# Altium PCB 600V_20A_MotorController_V2.0.PcbDoc (part 2 of 2)
Units mil, origin at the board's own origin, x right, y up, seen from the top; angles counter-clockwise.
Board outline 9360 x 6410 mil, 4 copper layers (Top Layer, GND, VCC, Bottom Layer); 277 components, 153 nets, 1032 pads, 389 vias.
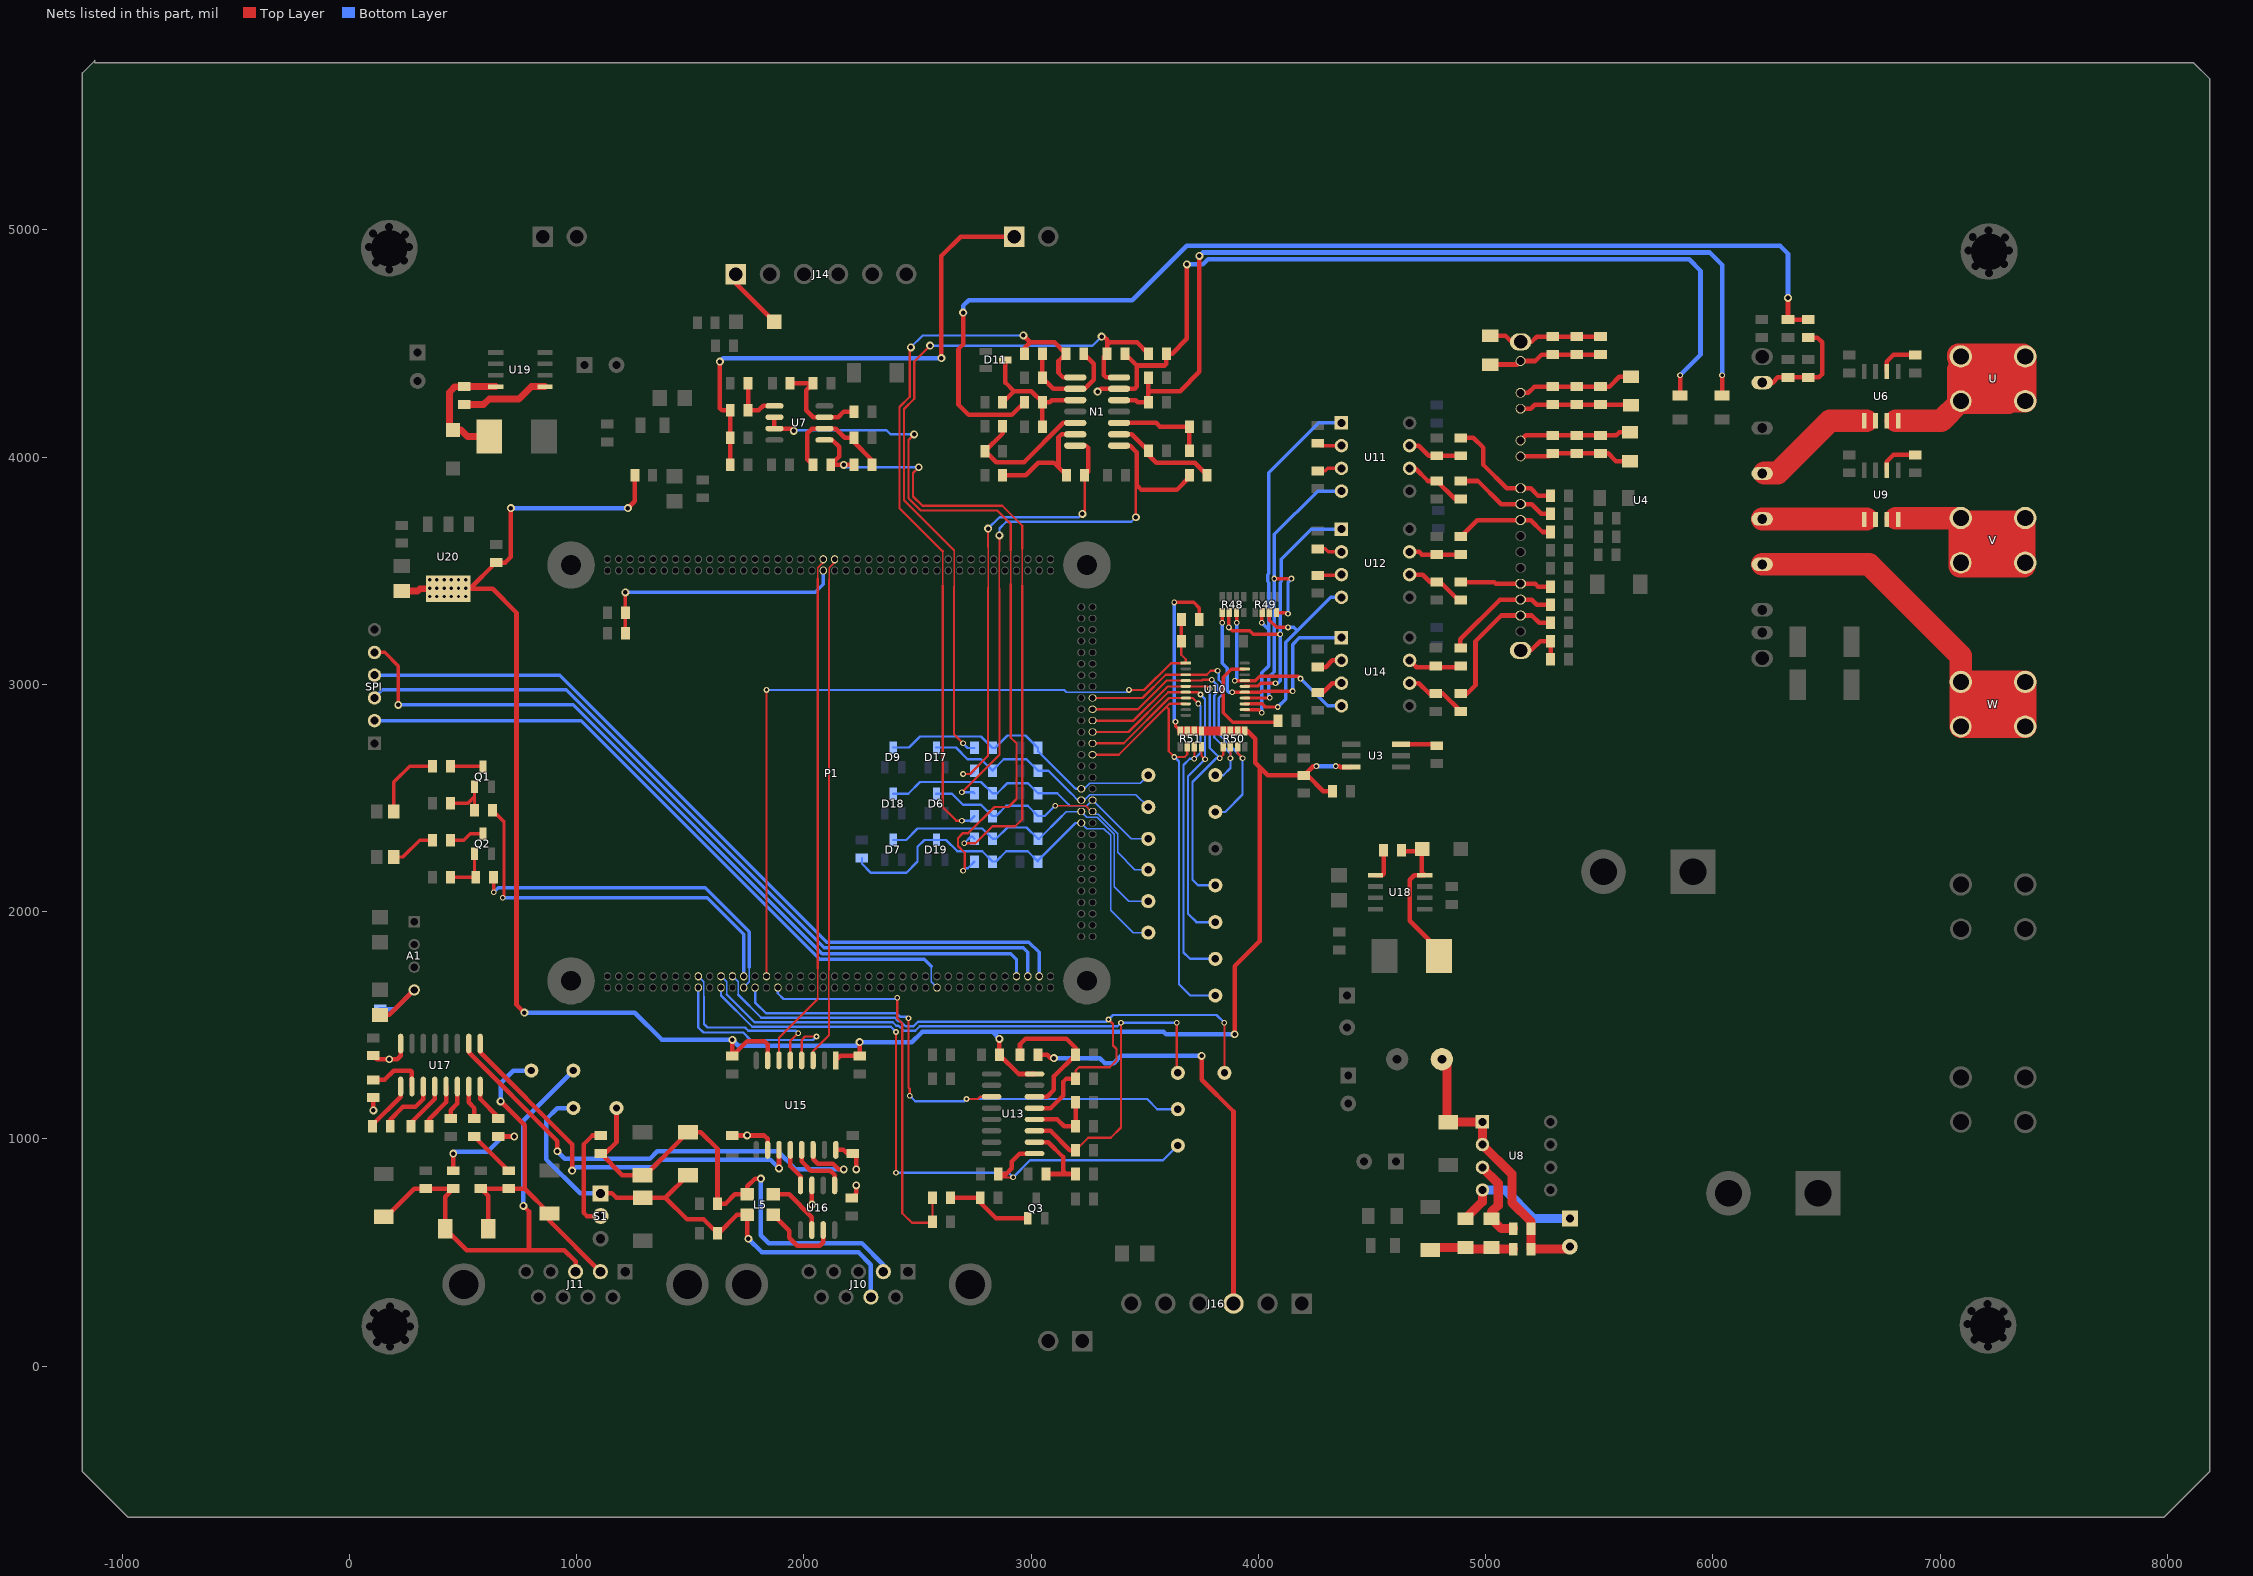
[diagram p4: the nets of this part, all layers, seen from the top]

## Via types
v1: diameter 25, hole 15, Top Layer to Bottom Layer, 193 vias
v2: diameter 35, hole 20, Top Layer to Bottom Layer, 140 vias
v3: diameter 25, hole 16, Top Layer to Bottom Layer, 32 vias
v4: diameter 50, hole 28, Top Layer to Bottom Layer, 23 vias
v5: diameter 28, hole 20, Top Layer to Bottom Layer, 1 vias

## Nets (pads, with @x,y where several pads share a name; then routed paths per layer and width w, separated by ;. In a path a pad name is that pad's centre, name@x,y a point inside that pad or via, vN(x,y) a via of type N, cw(c..) or ccw(c..) an arc to the next point about the centre after c; other vN are vias at no path point) (continued)
"ISO RS232 RX": U15.11 U17.9 | length 1753.2
  Top Layer w20: U17.9@575,1418.98 575,1380 980,975 v2(980,860) ; v2(1890,870) U15.11@1890,951.3
  Bottom Layer w20: v2(980,860) 995,875 1336.05,875 1368.55,907.5 1852.5,907.5 v2(1890,870)
"ISO RS232 TX": U15.14 U17.10 | length 2150.7
  Top Layer w20: U17.10@525,1418.98 525,1380 915,990 v2(915,945) ; U15.14@2040,951.3 2040,910 2060,890 2127.43,890 2152.43,865 v2(2175,865)
  Bottom Layer w20: v2(915,945) 947.76,912.24 1322.24,912.24 1355,945 1885,945 1965,865 v2(2175,865)
"J1-8-TEMP SWITCH2": C67.2 J12.1 R32.2 R36.1 | length 2281.2
  Top Layer w20: v2(1630,4420) 1630,4215 1640,4205 R36.1@1675.63,4205 C67.2@1675.63,4085 R32.2@1675.63,3965 ; v2(2605,4435) 2605,4885 2690,4970 J12.1@2925,4970
  Bottom Layer w20: v2(1630,4420) 1645,4435 v2(2605,4435)
"J1-23-CAN H": C107.2 D27.1 D29.1 J10.7 L5.4 S1.1 TP22.1 | length 2346
  Top Layer w20: S1.1@1105,760 1155,760 1174.72,740.28 D27.1@1290.26,740.28 1390.31,740.28 ; D29.1@1489.74,839.72 1390.31,740.28 ; v2(1755,560) 1750.83,564.17 L5.4@1750.83,665 1705,665 1625,585 C107.2@1619.37,585 1559.37,645 1485.59,645 1390.31,740.28
  Bottom Layer w20: TP22.1@985,1135 915,1135 865,1085 865,910 1015,760 S1.1@1105,760 ; v2(1755,560) 1815,500 2240,500 2294.53,445.47 J10.7@2294.53,303.11
J1-28-TX: C99.2 D30.1 D32.2 J11.2 L4.1 TP21.1 | length 1551.4
  Top Layer w20: D30.1@610.28,604.74 610.28,748.68 C99.2@578.33,780.63 L4.1@700,780.63 770.94,780.63 ; v2(665,1165) 770.94,1059.06 770.94,780.63 ; J11.2@1104.06,414.92 880.26,638.72 D32.2@880.26,671.31 770.94,780.63
  Bottom Layer w20: v2(665,1165) 665,1245 720,1300 TP21.1@800,1300
J1-29-RX: C96.2 D30.2 D31.2 J11.3 L3.1 TP20.1 | length 2118.6
  Top Layer w20: D31.2@150.26,656.31 161.31,656.31 285.63,780.63 C96.2@335,780.63 L3.1@456.67,780.63 421.31,745.27 D30.2@421.31,604.74 516.05,510 790,510 ; v2(765,705) 790,680 790,510 ; J11.3@995,414.92 995,460 945,510 790,510
  Bottom Layer w20: v2(765,705) 765,1080 TP20.1@985,1300
"J1-35-CAN L": C108.2 D28.1 D29.2 J10.2 L5.3 R84.1 TP23.1 | length 2274.1
  Top Layer w20: TP23.1@1175,1135 1175,985 1125.63,935.63 R84.1@1105,935.63 1200.91,839.72 D28.1@1289.74,839.72 1300.76,839.72 D29.2@1489.74,1028.69 1546.31,1028.69 1619.37,955.63 C108.2@1619.37,715 1655,715 1695.55,755.55 L5.3@1750.83,755.55 1750.83,790.83 1785,825 v2(1810,825)
  Bottom Layer w20: v2(1810,825) 1810,575 1845,540 2255,540 2349.06,445.94 J10.2@2349.06,414.92
M+1: C11.1 C16.1 C17.1 D3.2 U4.26 | length 505.6
  Top Layer w20: D3.2@5020,4532.99 5087.01,4532.99 5113.72,4506.28 U4.26@5153.5,4506.28 5201.28,4506.28 5224.37,4529.37 C17.1@5295,4529.37 C11.1@5400,4529.37 C16.1@5505,4529.37
M+2: C22.1 C23.1 C28.1 D4.2 U4.24 | length 515.7
  Top Layer w20: U4.24@5153.5,4282.5 5187.5,4282.5 5214.37,4309.37 C23.1@5295,4309.37 C22.1@5400,4309.37 C28.1@5505,4309.37 5544.37,4309.37 5587.99,4352.99 D4.2@5640,4352.99
M+3: C44.1 C45.1 C47.1 D8.2 U4.22 | length 496.2
  Top Layer w20: U4.22@5153.5,4072.5 5176,4095 C45.1@5295,4095 C47.1@5400,4095 C44.1@5505,4095 5575,4095 5587.99,4107.99 D8.2@5635,4107.99
M-1: C11.2 C16.2 C17.2 D3.1 U4.25 | length 503.1
  Top Layer w20: D3.1@5020,4407.01 5138.01,4407.01 U4.25@5153.5,4422.5 5217.5,4422.5 5245.63,4450.63 C17.2@5295,4450.63 C11.2@5400,4450.63 C16.2@5505,4450.63
M-2: C22.2 C23.2 C28.2 D4.1 U4.23 | length 495.5
  Top Layer w20: U4.23@5153.5,4212.5 5197.5,4212.5 5215.63,4230.63 C23.2@5295,4230.63 C22.2@5400,4230.63 C28.2@5505,4230.63 5636.38,4230.63 D4.1@5640,4227.01
M-3: C44.2 C45.2 C47.2 D8.1 U4.21 | length 501.4
  Top Layer w20: U4.21@5153.5,4002.5 5281.24,4002.5 C45.2@5295,4016.26 C47.2@5400,4016.26 C44.2@5505,4016.26 5538.74,4016.26 5572.99,3982.01 D8.1@5635,3982.01
NetC3_1: C3.1 N1.13 R3.1 R6.2 | length 3847.3
  Top Layer w20: v2(3292.5,4287.5) 3305,4300 N1.13@3386.46,4300 3455,4300 3465,4310 3465,4402.7 ; C3.1@3412.7,4455 3465,4402.7 ; v2(3685,4847.5) 3685,4520 3620,4455 R3.1@3594.37,4455 3594.37,4409.37 3587.7,4402.7 3465,4402.7 ; R6.2@5855,4271.3 v1(5855,4360)
  Bottom Layer w20: v2(3685,4847.5) 3755.53,4847.5 3778.03,4870 5895,4870 5945,4820 5945,4450 v1(5855,4360)
NetC3_2: C3.2 N1.14 R3.2 R14.1 | length 3205.1
  Top Layer w6: 2660,3430 2660.25,3430.25 2660.25,3589.75
  Top Layer w10: v2(2555,4490) 2485,4420 2485,4256.72 2440,4211.72 2440,3810 2660.25,3589.75 ; 2660,3430 2660,2780 v1(2700,2740)
  Top Layer w20: v2(3310,4530) 3320,4530 3333.96,4516.04 3333.96,4493.96 ; N1.14@3386.46,4350 3330,4350 3320,4360 3320,4441.04 C3.2@3333.96,4455 3333.96,4493.96 ; R3.2@3515.63,4455 3465.63,4505 3345,4505 3333.96,4493.96
  Bottom Layer w10: v2(2555,4490) 3270,4490 v2(3310,4530) ; v1(2700,2740) 2720,2720 R14.1@2750.63,2720
NetC4_1: C4.1 N1.2 R5.2 R7.1 | length 502.3
  Top Layer w20: R5.2@3049.37,4455 R7.1@3049.37,4348 3097.37,4300 N1.2@3193.54,4300 3235,4300 3275,4340 3275,4411.04 C4.1@3231.04,4455
NetC4_2: C4.2 N1.1 R5.1 R10.2 | length 3273.2
  Top Layer w6: 2610.25,3434.75 2610.25,3584.75
  Top Layer w10: v2(2470,4482.5) 2465,4477.5 2465,4265 2420,4220 2420,3775 2610.25,3584.75 ; 2610.25,3434.75 2610.25,2459.75 2670,2400 v1(2695,2400)
  Top Layer w20: v2(2965,4535) 2995,4505 ; R5.1@2970.63,4455 2970.63,4480.63 2995,4505 ; N1.1@3193.54,4350 3140,4350 3120,4370 3120,4422.7 C4.2@3152.3,4455 3102.3,4505 2995,4505
  Bottom Layer w10: v2(2470,4482.5) 2522.5,4535 v2(2965,4535) ; v1(2695,2400) 2730.63,2400 R10.2@2750.63,2420
NetC5_1: C5.1 R4.2 R8.1 U7.2 | length 533
  Top Layer w20: R4.2@2038.96,3965 2015,3988.96 2015,4105 2035,4125 U7.2@2090,4125 2140,4125 2180,4085 R8.1@2220.63,4085 2220.63,4064.37 2299.37,3985.63 C5.1@2299.37,3965
NetC5_2: C5.2 R4.1 R11.2 U7.1 | length 2935.3
  Top Layer w6: 2960,3435 2960,3595
  Top Layer w10: v2(2505,3955) 2480,3930 2480,3826.57 2521.57,3785 2872.43,3785 2960,3697.43 2960,3595 ; v1(2705,2300) 2755,2300 2830,2375 2930,2375 2960,2405 2960,3435
  Top Layer w20: U7.1@2090,4075 2125,4075 2155,4045 2155,4002.3 R4.1@2117.7,3965 C5.2@2220.63,3965
  Bottom Layer w10: v2(2175,3965) 2185,3955 v2(2505,3955) ; v1(2705,2300) 2735,2330 2740.63,2330 R11.2@2750.63,2320
NetC21_2: C21.2 R9.2 U4.20 | length 544.9
  Top Layer w20: R9.2@4890,4084.37 4945.63,4084.37 4990,4040 4990,3965 5092.5,3862.5 U4.20@5153.5,3862.5 5197.5,3862.5 5230,3830 C21.2@5285.63,3830
NetC30_2: C30.2 D6.3 P1.183 R10.1 TEMP.1 | length 1193.3
  Top Layer w6: v1(3105,2465) 3240,2465 3265,2440 P1.183@3270,2440
  Bottom Layer w6: P1.183@3270,2440 3283,2427 3294.97,2427 3380,2341.97 3380,2260 3455.71,2184.29 TEMP.1@3515,2184.29
  Bottom Layer w10: D6.3@2582.6,2518.28 2651.72,2518.28 2700,2470 2779.37,2470 R10.1@2829.37,2420 2845,2420 2890,2465 2984.37,2465 C30.2@3029.37,2420 3060,2420 v1(3105,2465)
NetC31_2: C31.2 D7.3 DSP-AD.1 P1.184 R11.1 | length 1551
  Bottom Layer w6: 3135,2420 3155,2440 P1.184@3220,2440 3245,2415 3290,2415 3365,2340 3365,2110 3429.29,2045.71 DSP-AD.1@3515,2045.71
  Bottom Layer w10: D7.3@2392.6,2314.95 2449.95,2314.95 2500,2365 2784.37,2365 R11.1@2829.37,2320 2845,2320 2895,2370 2979.37,2370 C31.2@3029.37,2320 3035,2320 3135,2420
NetC32_2: C32.2 R12.2 R16.1 U7.3 | length 467.4
  Top Layer w20: R16.1@1939.37,4325 C32.2@2040.63,4325 2010,4294.37 2010,4205 2040,4175 U7.3@2090,4175 2150,4175 2175,4200 R12.2@2220.63,4200
NetC38_2: C38.2 D11.3 N1.3 R13.2 R17.1 | length 624.1
  Top Layer w20: R17.1@2874.37,4240 2924.37,4290 ; D11.3@2886.61,4427.6 2886.61,4327.76 2924.37,4290 ; C38.2@3049.37,4134 R13.2@3049.37,4241 ; N1.3@3193.54,4250 3090,4250 3081,4241 R13.2@3049.37,4241 ; 2924.37,4290 3000.37,4290 R13.2@3049.37,4241
NetC39_2: C39.2 D9.3 P1.188 R14.2 VDC.1 | length 1316.5
  Bottom Layer w6: P1.188@3220,2540 3232.75,2540 3257.5,2564.75 3479.75,2564.75 VDC.1@3515,2600
  Bottom Layer w10: D9.3@2392.6,2721.61 2461.61,2721.61 2510,2770 2779.37,2770 R14.2@2829.37,2720 2840,2720 2895,2775 2974.37,2775 C39.2@3029.37,2720 3029.37,2705.63 3195,2540 P1.188@3220,2540
NetC40_2: C40.2 U6.6 | length 180.6
  Top Layer w20: U6.6@6765,4376.54 6765,4420 6794.37,4449.37 C40.2@6890,4449.37
NetC43_2: C43.2 R18.2 U4.19 | length 455.4
  Top Layer w20: R18.2@4890,3894.37 4965.63,3894.37 5067.5,3792.5 U4.19@5153.5,3792.5 5202.5,3792.5 5245,3750 C43.2@5285.63,3750
NetC48_2: C48.2 N1.12 R15.2 R19.2 | length 3912.2
  Top Layer w20: N1.12@3386.46,4250 3460,4250 3469,4241 R19.2@3515.63,4241 3515.63,4290 ; C48.2@3515.63,4348 3515.63,4290 ; v2(3740,4885) 3740,4375 3655,4290 3515.63,4290 ; R15.2@6040,4271.3 v1(6040,4360)
  Bottom Layer w20: v2(3740,4885) 3755,4900 5985,4900 6040,4845 v1(6040,4360)
NetC56_2: C56.2 R20.2 U4.18 | length 447.7
  Top Layer w20: R20.2@4890,3649.37 4963.13,3722.5 U4.18@5153.5,3722.5 5197.5,3722.5 5250,3670 C56.2@5285.63,3670
NetC58_2: C58.2 R25.2 U4.14 | length 403.7
  Top Layer w20: R25.2@4890,3449.37 5038.13,3449.37 5045,3442.5 U4.14@5153.5,3442.5 5217.5,3442.5 5230,3430 C58.2@5285.63,3430
NetC59_2: C59.2 R26.2 U4.13 | length 515.6
  Top Layer w20: R26.2@4887.5,3161.87 4887.5,3197.5 5062.5,3372.5 U4.13@5153.5,3372.5 5202.5,3372.5 5225,3350 C59.2@5285.63,3350
NetC60_2: C60.2 R29.2 U4.12 | length 665.4
  Top Layer w20: R29.2@4890,2959.37 4919.37,2959.37 4955,2995 4955,3190 5067.5,3302.5 U4.12@5153.5,3302.5 5202.5,3302.5 5235,3270 C60.2@5285.63,3270
NetC61_2: C61.2 R31.1 U4.10 | length 229.2
  Top Layer w20: U4.10@5153.5,3148.72 5198.72,3148.72 5240,3190 C61.2@5285.63,3190 R31.1@5285.63,3110
NetC62_1: C62.1 D20.2 U8.4 | length 594.6
  Top Layer w40: D20.2@4910.47,647.52 4985.47,722.52 U8.4@4985.47,774.53
  Bottom Layer w40: U8.4@4985.47,774.53 5085.47,774.53 5211,649 C62.1@5370,649
NetC62_2: C62.2 C70.1 C73.1 D22.2 L2.1 U8.1 U8.2 | length 1260
  Top Layer w40: L2.1@4806.85,1350 4830,1326.85 4830,1081.05 4836.52,1074.53 U8.1@4985.47,1074.53 U8.2@4985.47,974.53 5115,845 5115,719.53 5199.84,634.68 C73.1@5199.84,604.53 C70.1@5199.84,514.53 5359.53,514.53 C62.2@5370,525
NetC64_2: C64.2 U9.6 | length 175.6
  Top Layer w20: U9.6@6765,3941.54 6765,3980 6794.37,4009.37 C64.2@6890,4009.37
NetC65_2: C65.2 D19.3 P1.182 R33.2 R40.2 TEMP1.1 | length 1943.2
  Bottom Layer w6: P1.182@3220,2390 3245,2365 3320,2365 3350,2335 3350,2005 3447.86,1907.14 TEMP1.1@3515,1907.14
  Bottom Layer w10: R40.2@2255,2235.63 2255,2210 2295,2170 2450,2170 2500,2220 2500,2285 2529.95,2314.95 D19.3@2582.6,2314.95 2625.05,2314.95 2675,2265 2784.37,2265 R33.2@2829.37,2220 2845,2220 2890,2265 2984.37,2265 C65.2@3029.37,2220 3029.37,2224.37 3195,2390 P1.182@3220,2390
NetC66_2: C66.2 R36.2 U7.5 | length 243.9
  Top Layer w20: C66.2@1754.37,4325 R36.2@1754.37,4205 1800,4205 1820,4225 U7.5@1870,4225
NetC68_2: C68.2 D17.3 IV.1 P1.186 R37.1 | length 1103
  Bottom Layer w6: 3175,2520 3205,2490 P1.186@3220,2490 3232.75,2490 3257.5,2514.75 3429.75,2514.75 ; 3430,2515 3429.75,2514.75 ; IV.1@3515,2460 3460.25,2514.75 3429.75,2514.75
  Bottom Layer w10: D17.3@2582.6,2721.61 2668.39,2721.61 2720,2670 2779.37,2670 R37.1@2829.37,2620 2879.37,2670 2979.37,2670 C68.2@3029.37,2620 3075,2620 3175,2520
NetC69_2: C69.2 D18.3 IU.1 P1.185 R38.1 | length 1305.2
  Bottom Layer w6: 3165,2470 3169.75,2465.25 3245.25,2465.25 P1.185@3270,2490 3440,2320 IU.1@3515,2320
  Bottom Layer w10: D18.3@2392.6,2518.28 2458.28,2518.28 2510,2570 2779.37,2570 R38.1@2829.37,2520 2850,2520 2895,2565 2984.37,2565 C69.2@3029.37,2520 3115,2520 3165,2470
NetC70_2: C70.2 D20.1 D21.2 Z3.2 | length 372.7
  Top Layer w40: D21.2@4755.73,510.83 4766.43,521.54 D20.1@4910.47,521.54 4917.48,514.53 C70.2@5121.1,514.53
NetC71_2: C71.2 R41.1 R44.2 U4.2 | length 487.6
  Top Layer w20: U4.2@6216.5,4327.5 6262.5,4327.5 6285.63,4350.63 C71.2@6330,4350.63 R44.2@6420,4350.63 6465.63,4350.63 6480,4365 6480,4505 6459.37,4525.63 R41.1@6420,4525.63
NetC73_2: C73.2 U8.3 Z3.1 | length 391.5
  Top Layer w40: U8.3@4995.47,874.53 U8.3@4985.47,874.53 4985.47,872.85 5055,803.33 5055,707.19 5025.47,677.67 Z3.1@5025.47,647.52 5068.46,604.53 C73.2@5121.1,604.53
NetC82_2: C82.2 P1.30 R52.1 U10.1 | length 3362
  Top Layer w10: P1.30@1835,1715 v1(1835,2975) ; v1(3430,2975) 3496.72,2975 3614.72,3093 U10.1@3680,3093 3680,3110 3660.63,3129.37 C82.2@3660.63,3190
  Top Layer w15: C82.2@3660.63,3190 R52.1@3660.63,3285
  Bottom Layer w6: 3150,2970 3154.75,2965.25 3420.25,2965.25 v1(3430,2975)
  Bottom Layer w10: v1(1835,2975) 3145,2975 3150,2970
NetC88_1: C88.1 P1.24 U13.13 Z.1 | length 3241.6
  Top Layer w10: C88.1@3195.63,1265 3195.63,1300.63 3210,1315 3345,1315 3375,1345 3375,1395 3360,1410 3360,1505 v1(3340,1525) ; Z.1@3850,1290 v1(3850,1510)
  Top Layer w20: U13.13@3014.49,1135 3085,1135 3140,1190 3140,1250 3155,1265 C88.1@3195.63,1265
  Bottom Layer w6: P1.24@1685,1715 1710,1690 1710,1635
  Bottom Layer w10: 1710,1635 1812.5,1532.5 2399.07,1532.5 2414.07,1517.5 2424.67,1517.5 2447.17,1495 2481.36,1495 2501.36,1515 3330,1515 v1(3340,1525) 3360,1545 3815,1545 v1(3850,1510)
NetC90_1: C90.1 R67.2 U13.10 | length 364.7
  Top Layer w20: U13.10@3014.49,985 3075,985 3140,920 3140,860 3155,845 ; R67.2@3064.58,845 3155,845 ; C90.1@3195.63,845 3155,845
NetC91_1: C91.1 R72.2 U13.12 | length 298.6
  Top Layer w20: U13.12@3014.49,1085 3115,1085 3145,1055 R72.2@3195.63,1055 C91.1@3195.63,1160
NetC92_1: C92.1 R73.2 U13.14 | length 639.5
  Top Layer w20: R73.2@2950.63,1370 2950.63,1415.63 2975,1440 3155,1440 3195.63,1399.37 C92.1@3195.63,1370 3100,1274.37 3100,1215 3070,1185 U13.14@3014.49,1185
NetC93_1: B.1 C93.1 P1.22 U13.11 | length 3290.3
  Top Layer w10: C93.1@3195.63,950 3250.63,1005 3350,1005 3395,1050 v1(3395,1510) ; v1(3640,1510) 3640,1295 B.1@3645,1290
  Top Layer w20: U13.11@3014.49,1035 3085,1035 3170,950 C93.1@3195.63,950
  Bottom Layer w6: P1.22@1635,1715 1660,1690 1660,1635
  Bottom Layer w10: 1660,1635 1782.5,1512.5 2390.78,1512.5 2405.78,1497.5 2416.39,1497.5 2438.89,1475 2489.64,1475 2509.64,1495 3380,1495 v1(3395,1510) v1(3640,1510)
NetC94_1: A.1 C94.1 P1.21 U13.9 | length 3083.5
  Top Layer w10: v1(2405,850) v1(2405,1470) ; C94.1@2854.79,845 2869.79,830 v1(2920,830)
  Top Layer w20: C94.1@2854.79,845 2890,845 2915,870 2915,900 2950,935 U13.9@3014.49,935
  Bottom Layer w10: P1.21@1635,1665 1635,1630 1772.5,1492.5 2382.5,1492.5 v1(2405,1470) ; v1(2405,850) 2900,850 v1(2920,830) 2995,905 3580,905 A.1@3645,970
NetC95_1: C95.1 Q3.1 R80.1 | length 390
  Top Layer w20: R80.1@2644.37,740 C95.1@2775.63,740 2775.63,719.37 2845,650 Q3.1@2985,650
NetC100_1: C100.1 U17.3 | length 267.5
  Top Layer w20: C100.1@179.37,1055 179.37,1084.37 235,1140 290,1140 325,1175 U17.3@325,1230
NetC100_2: C100.2 U17.1 | length 226.5
  Top Layer w20: C100.2@100.63,1055 100.63,1060.63 225,1185 U17.1@225,1230
NetC101_1: C101.1 U17.2 | length 253.9
  Top Layer w20: C101.1@105,1259.37 154.37,1259.37 195,1300 270,1300 275,1295 U17.2@275,1230
NetC104_1: C104.1 U17.5 | length 206.3
  Top Layer w20: C104.1@349.37,1055 349.37,1084.37 425,1160 U17.5@425,1230
NetC104_2: C104.2 U17.4 | length 218.2
  Top Layer w20: C104.2@270.63,1055 270.63,1070.63 375,1175 U17.4@375,1230
NetC109_1: C109.1 U17.6 | length 153.1
  Top Layer w20: C109.1@445,1089.37 445,1125 475,1155 U17.6@475,1230
NetC110_1: C110.1 D35.2 L8.1 U19.8 | length 558
  Top Layer w30: L8.1@615,4090 520,4090 490.74,4119.25 D35.2@454.82,4119.25 440,4134.08 440,4285 464.37,4309.37 C110.1@505,4309.37 505.63,4310 U19.8@643.46,4310
NetC110_2: C110.2 U19.1 | length 387.9
  Top Layer w30: C110.2@505,4230.63 590.63,4230.63 615,4255 745,4255 800,4310 U19.1@860,4310
NetC111_1: C111.1 D34.2 L7.1 U18.8 | length 677.5
  Top Layer w20: C111.1@4629.37,2265 4710.92,2265 D34.2@4719.26,2273.33 ; D34.2@4720.74,2274.82 D34.2@4719.26,2273.33 ; L7.1@4795,1805 4795,1830 4665,1960 4665,2140 4685,2160 U18.8@4731.54,2160 4719.26,2172.28 D34.2@4719.26,2273.33
NetC111_2: C111.2 U18.1 | length 142.3
  Top Layer w20: U18.1@4515,2160 4545,2160 4550.63,2165.63 C111.2@4550.63,2270
NetD25_2: D25.2 R53.2 | length 329.7
  Top Layer w15: D25.2@194.8,2440 194.8,2569.8 265,2640 R53.2@365.63,2640
NetD26_2: D26.2 R54.2 | length 201.2
  Top Layer w15: D26.2@194.8,2240 235,2240 308.33,2313.33 R54.2@365.63,2313.33
NetD33_2: D33.2 J14.1 | length 279.9
  Top Layer w20: J14.1@1700,4805 1700,4764.43 D33.2@1869.26,4595.18
NetJ15_2: P1.59 SPI.2 | length 3002.7
  Bottom Layer w6: 2560,1760 2560,1690 P1.59@2585,1665
  Bottom Layer w15: SPI.2@110,2840 1018.93,2840 2068.93,1790 2530,1790 2560,1760
NetJ15_3: P1.76 SPI.3 | length 3472.9
  Bottom Layer w15: SPI.3@110,2940 145,2975 954.64,2975 2089.64,1840 2965,1840 2985,1820 P1.76@2985,1715
NetJ15_4: P1.78 SPI.4 | length 3535.3
  Bottom Layer w15: SPI.4@110,3040 925,3040 2100,1865 2990,1865 3035,1820 P1.78@3035,1715
NetJ15_5: P1.74 SPI.5 | length 3559.2
  Top Layer w15: SPI.5@110,3140 155,3140 214.64,3080.36 v2(214.64,2909.64)
  Bottom Layer w15: v2(214.64,2909.64) 984.64,2909.64 2079.29,1815 2910,1815 2935,1790 P1.74@2935,1715
NetL3_2: L3.2 R82.2 | length 444.4
  Top Layer w20: L3.2@456.67,859.37 v2(456.67,935) ; R82.2@655.63,1010 v2(725,1010)
  Bottom Layer w20: v2(456.67,935) 464.17,942.5 607.5,942.5 675,1010 v2(725,1010)
NetL4_2: L4.2 R83.2 | length 213.4
  Top Layer w20: R83.2@550,1010.63 550,1009.37 L4.2@700,859.37
NetL5_1: L5.1 U16.7 | length 352.9
  Top Layer w20: L5.1@1865,665 1935,595 1935,565 1970,530 2070,530 2084.7,544.7 U16.7@2084.7,598.3
NetL5_2: L5.2 U16.6 | length 268.2
  Top Layer w20: L5.2@1865,755.55 1934.45,755.55 2034.7,655.3 U16.6@2034.7,598.3
NetN1_5: N1.5 R42.2 R45.1 | length 632.3
  Top Layer w20: R45.1@2795,4025 R45.1@2795.63,4025 ; R42.2@2874.37,4135 2874.37,4103.74 R45.1@2795.63,4025 ; N1.5@3193.54,4150 3140.9,4150 2968.34,3977.44 2846.4,3977.44 2798.84,4025 R45.1@2795.63,4025
NetN1_6: N1.6 R27.2 R34.1 | length 537.8
  Top Layer w20: R34.1@2874.37,3920 2975.63,3920 3030.63,3975 3100,3975 3120,3955 3120,4086.68 3133.32,4100 N1.6@3193.54,4100 ; 3120,3955.63 R27.2@3155.63,3920
NetN1_7: N1.7 R27.1 R37.2 | length 2003.4
  Top Layer w6: 2810,3425 2810,3605
  Top Layer w10: v1(2700,2605) 2730,2605 2810,2685 2810,3425 ; 2810,3605 v2(2810,3685) ; v2(3225,3750) 3235,3760 3235,3915.51 3234.37,3916.14 R27.1@3234.37,3920
  Top Layer w20: N1.7@3193.54,4050 3240,4050 3250,4040 3250,3935.63 R27.1@3234.37,3920
  Bottom Layer w10: v1(2700,2605) 2735.63,2605 R37.2@2750.63,2620 ; v2(2810,3685) 2860,3735 3210,3735 v2(3225,3750)
NetN1_8: N1.8 R30.1 R38.2 | length 2556.1
  Top Layer w6: 2860,3420 2860,3585
  Top Layer w10: v1(2695,2525) 2860,2690 2860,3420 ; 2860,3585 v2(2860,3655) ; v2(3460,3735) 3460,3870 3465,3875
  Top Layer w20: N1.8@3386.46,4050 3435,4050 3465,4020 3465,3875 3485,3855 3640,3855 3695.63,3910.63 R30.1@3695.63,3920
  Bottom Layer w10: v1(2695,2525) 2745.63,2525 R38.2@2750.63,2520 ; v2(2860,3655) 2860,3685 2890,3715 3440,3715 v2(3460,3735)
NetN1_9: N1.9 R30.2 R35.1 | length 472.8
  Top Layer w20: N1.9@3386.46,4100 3442.63,4100 R35.1@3515.63,4027 3515.63,4009.37 3550,3975 3719.37,3975 R30.2@3774.37,3920
NetN1_10: N1.10 R39.2 R46.1 | length 422.8
  Top Layer w20: N1.10@3386.46,4150 3550,4150 3566,4134 R39.2@3695.63,4134 R46.1@3695.63,4027
NetP1_17: P1.17 U15.4 | length 885.2
  Top Layer w10: U15.4@1990,1345 1990,1435 2005,1450 v1(2055,1450)
  Bottom Layer w10: P1.17@1535,1665 1535,1490 1557.5,1467.5 1732.5,1467.5 1765,1435 2040,1435 v1(2055,1450)
NetP1_18: P1.18 U15.5 | length 786.4
  Top Layer w10: U15.5@1940,1345 1940,1430 v1(1975,1465)
  Bottom Layer w6: P1.18@1535,1715 1560,1690 1560,1625
  Bottom Layer w10: 1560,1625 1560,1505 1575,1490 1740,1490 1755,1475 1965,1475 v1(1975,1465)
NetP1_25: P1.25 R60.2 | length 1534.7
  Top Layer w15: R60.2@634.37,2150 635,2149.37 v1(635,2085)
  Bottom Layer w6: P1.25@1735,1665 1760,1690 1760,1755
  Bottom Layer w15: v1(635,2085) 655,2105 1565,2105 1760,1910 1760,1755
NetP1_26: P1.26 R59.2 | length 1719.1
  Top Layer w15: R59.2@629.37,2445 680,2394.37 680,2065 v1(675,2060)
  Bottom Layer w15: v1(675,2060) 1574.64,2060 1735,1899.64 P1.26@1735,1715
NetP1_27: GPIO.1 P1.27 U13.3 | length 2438.9
  Top Layer w10: v1(2460,1530) 2460,1225 2465,1220 v1(2465,1190) ; v1(2715,1175) 2765,1175 2775,1185 U13.3@2825.51,1185
  Bottom Layer w10: P1.27@1785,1665 1785,1600 1832.5,1552.5 2407.35,1552.5 2422.35,1537.5 2452.5,1537.5 v1(2460,1530) ; v1(2465,1190) 2490,1165 2705,1165 v1(2715,1175) 3510,1175 3555,1130 GPIO.1@3645,1130
NetP1_31: P1.31 R80.2 R81.1 | length 1791.2
  Top Layer w10: v1@2415,1615 v1(2410,1620) 2410,1530 2432.5,1507.5 2432.5,672.5 2475,630 2560.63,630 R81.1@2565.63,635 R80.2@2565.63,740
  Bottom Layer w10: P1.31@1885,1665 1885,1640 1910,1615 2405,1615 v1(2410,1620) v1@2415,1615
NetP1_119: P1.119 R74.1 R75.2 | length 1124.8
  Top Layer w15: R75.2@1214.37,3225 R74.1@1214.37,3315 v2(1214.37,3404.37)
  Bottom Layer w15: v2(1214.37,3404.37) 2049.37,3404.37 2085,3440 P1.119@2085,3500
NetP1_120: P1.120 U15.6 | length 2285.8
  Top Layer w6: 2060.25,1614.75 2060.25,1750 ; 2060.25,3465 2060.25,3512.5 2085,3537.25 P1.120@2085,3550
  Top Layer w10: U15.6@1890,1345 1890,1444.5 2060.25,1614.75 ; 2060.25,1750 2060.25,3465
NetP1_122: P1.122 U15.3 | length 2244.4
  Top Layer w6: 2110,1605 2110,1745 ; 2110.25,3460 2110.25,3512.5 2135,3537.25 P1.122@2135,3550
  Top Layer w10: U15.3@2040,1345 2040,1385 2110,1455 2110,1605 ; 2110,1745 2110.25,1745.25 2110.25,3460
NetP1_193: P1.193 PWM1.1 R51.2 U10.8 | length 2021
  Top Layer w10: P1.193@3270,2690 3385,2690 3608.87,2913.87 U10.8@3680,2913.87 ; 3595,2900 3605,2890 3605,2705 v1(3630,2680) 3675,2680 3686.5,2691.5 R51.2@3686.5,2725
  Bottom Layer w10: v1(3630,2680) 3650,2660 3650,1680 3700,1630 PWM1.1@3810,1630
NetP1_195: P1.195 PWM2.1 R51.3 U10.7 | length 1905
  Top Layer w10: P1.195@3270,2740 3406.57,2740 3606.02,2939.46 U10.7@3680,2939.46 3710.54,2939.46 v1(3735,2915) ; v1(3717.99,2672.01) R51.3@3717.99,2725
  Bottom Layer w10: v1(3735,2915) 3745,2905 3745,2699.02 v1(3717.99,2672.01) 3697.01,2672.01 3670,2645 3670,1820 3698.33,1791.67 PWM2.1@3810,1791.67
NetP1_197: P1.197 PWM3.1 R51.4 U10.6 | length 1752.6
  Top Layer w10: P1.197@3270,2790 3428.28,2790 3603.33,2965.05 U10.6@3680,2965.05 3734.95,2965.05 v1(3745,2955) ; R51.4@3749.49,2725 3749.49,2685.51 v1(3765,2670)
  Bottom Layer w10: v1(3745,2955) 3765,2935 v1(3765,2670) 3690,2595 3690,1990 3726.67,1953.33 PWM3.1@3810,1953.33
NetP1_199: P1.199 PWM4.1 R50.1 U10.5 | length 1665.5
  Top Layer w10: P1.199@3270,2840 3450,2840 3600.64,2990.64 U10.5@3680,2990.64 3774.36,2990.64 v1(3785,2980) ; v1(3830,2675) 3845,2690 R50.1@3845,2725
  Bottom Layer w10: v1(3785,2980) 3785,2720 v1(3830,2675) 3815,2675 3710,2570 3710,2270 3710,2140 3735,2115 PWM4.1@3810,2115
NetP1_201: P1.201 PWM5.1 R50.2 U10.4 | length 1143.1
  Top Layer w10: P1.201@3270,2890 3470,2890 3596.23,3016.23 3751.23,3016.23 3755,3020 v1(3795,3020) ; v1(3876.5,2675) R50.2@3876.5,2725
  Bottom Layer w10: v1(3795,3020) 3820,2995 3820,2965 3805,2950 3805,2766.72 3876.5,2695.22 v1(3876.5,2675) 3876.5,2631.5 3845,2600 PWM5.1@3810,2600
NetP1_203: P1.203 PWM6.1 R50.3 U10.3 | length 1413.6
  Top Layer w10: P1.203@3270,2940 3490,2940 3591.82,3041.82 U10.3@3680,3041.82 3771.82,3041.82 3790,3060 v1(3820,3060) ; R50.3@3907.99,2725 3907.99,2697.01 v1(3930,2675)
  Bottom Layer w10: PWM6.1@3810,2438.33 3853.33,2438.33 3930,2515 v1(3930,2675) 3825,2780 3825,2940 3840,2955 3840,2970 3840,3005 3825,3020 3825,3055 v1(3820,3060)
NetQ1_1: Q1.1 R59.1 R61.1 | length 221.7
  Top Layer w15: R61.1@444.37,2476.67 521.67,2476.67 550,2505 ; R59.1@550,2445.63 550,2505 ; Q1.1@550,2550 550,2505
NetQ1_3: Q1.3 R53.1 | length 144.4
  Top Layer w15: R53.1@444.37,2640 584.02,2640 Q1.3@587.4,2636.61
NetQ2_1: Q2.1 R60.1 R62.1 | length 218.6
  Top Layer w15: R62.1@444.37,2150 R60.1@555.63,2150 550,2155.63 Q2.1@550,2255
NetQ2_3: Q2.3 R54.1 | length 154.7
  Top Layer w15: R54.1@444.37,2313.33 503.33,2313.33 531.61,2341.61 Q2.3@587.4,2341.61
NetR2_2: R2.2 U3.3 | length 160
  Top Layer w20: U3.3@4627.78,2735.98 4778.39,2735.98 R2.2@4785,2729.37
NetR33_1: R33.1 U7.6 U7.7 | length 3231.8
  Top Layer w6: 2910,3440 2910,3590
  Top Layer w10: v2(2485,4100) 2460,4075 2460,3818.28 2513.28,3765 2850,3765 2910,3705 2910,3590 ; v1(2700,2180) 2707.5,2187.5 2707.5,2258.61 2677.5,2288.61 2677.5,2322.5 2700,2345 2723.28,2345 2838.28,2460 2900,2460 2935,2495 2935,2740 2910,2765 2910,3440
  Top Layer w20: U7.6@1870,4175 U7.7@1870,4125 v2@1950,4125
  Bottom Layer w10: v2(1955,4115) 1957.5,4117.5 2363.46,4117.5 2380.96,4100 v2(2485,4100) ; v1(2700,2180) 2710,2190 2720.63,2190 R33.1@2750.63,2220
NetR55_1: R55.1 U11.3 | length 104.4
  Top Layer w15: R55.1@4260,3939.37 4294.37,3939.37 4305,3950 U11.3@4360,3950
NetR56_1: R56.1 U11.2 | length 104.4
  Top Layer w15: R56.1@4260,4060.63 4270.63,4050 U11.2@4360,4050
NetR63_1: R63.1 U12.3 | length 106.3
  Top Layer w15: R63.1@4260,3479.37 4361.87,3479.37 U12.3@4365,3482.5
NetR64_1: R64.1 U12.2 | length 110.4
  Top Layer w15: R64.1@4260,3595.63 4294.37,3595.63 4307.5,3582.5 U12.2@4365,3582.5
NetR68_1: R68.1 U14.3 | length 121.8
  Top Layer w20: R68.1@4260,2964.37 4284.37,2964.37 4325,3005 U14.3@4365,3005
NetR69_1: R69.1 U14.2 | length 117.2
  Top Layer w20: R69.1@4260,3075.63 4295.63,3075.63 4325,3105 U14.2@4365,3105
NetR84_2: R84.2 S1.2 | length 472.5
  Top Layer w20: S1.2@1105,660 1045,660 1030,675 1030,975 1069.37,1014.37 R84.2@1105,1014.37
NetR90_2: R90.2 U10.19 | length 522.4
  Top Layer w15: U10.19@3938.25,3065.82 3880.81,3065.82 3845,3030 3845,2875 3887.5,2832.5 4083.13,2832.5 R90.2@4085.63,2830
NetU15_12: U15.12 U16.4 | length 174.7
  Top Layer w20: U15.12@1940,951.3 1940,880 1984.7,835.3 U16.4@1984.7,795.15
NetU15_13: U15.13 U16.1 | length 265.9
  Top Layer w20: U15.13@1990,951.3 1990,900 2030,860 2115,860 2134.7,840.3 U16.1@2134.7,795.15
OPWM1: R49.2 U10.12 U11.1 | length 1651.4
  Top Layer w15: U10.12@3939.84,2888.27 4001.72,2888.27 v1(4015,2875) ; v1(4015,3270) 4015,3313.5 R49.2@4016.5,3315
  Bottom Layer w15: v1(4015,2875) 4015,3050.36 4045,3080.36 4045,3240 ; v1(4015,3270) 4045,3240 ; U11.1@4365,4150 4265,4150 4045,3930 4045,3487.43 4040,3482.43 4040,3452.57 4045,3447.57 4045,3240
OPWM2: R49.3 U10.13 U12.4 | length 951.6
  Top Layer w15: U10.13@3939.84,2913.87 4016.13,2913.87 4030,2900 v1(4085,2900) ; R49.3@4047.99,3315 4047.99,3282.01 4080,3250 v1(4130,3250)
  Bottom Layer w15: v1(4085,2900) 4120,2935 4120,3185.36 4169.82,3235.18 ; v1(4130,3250) 4155,3250 4169.82,3235.18 ; U12.4@4365,3382.5 4317.14,3382.5 4169.82,3235.18
OPWM3: R49.4 U10.14 U11.4 | length 1505.3
  Top Layer w15: U10.14@3939.84,2939.46 4049.46,2939.46 v1(4050,2940) ; v1(4070,3465) v1(4145,3465) ; R49.4@4079.49,3315 4125,3315 v1(4130,3310)
  Bottom Layer w15: v1(4050,2940) 4045,2945 4045,3029.64 4070,3054.64 v1(4070,3465) 4070,3660 4260,3850 U11.4@4365,3850 ; v1(4130,3310) 4130,3450 v1(4145,3465)
OPWM4: R48.1 U10.15 U14.1 | length 1076.9
  Top Layer w15: v1(3840,3270) R48.1@3840,3315 ; v1(3885,2965) v1(3885,2965) U10.15@3939.84,2965.05 4009.41,2965.05 4014.36,2970 v1(4150,2970)
  Bottom Layer w15: v1(3840,3270) 3840,3092.43 3862.5,3069.93 3862.5,2972.5 3870,2965 v1(3885,2965) ; v1(4150,2970) 4150,3175 4180,3205 U14.1@4365,3205
OPWM5: R48.2 U10.16 U12.1 | length 1325.2
  Top Layer w15: R48.2@3871.5,3315 3870,3313.5 v1(3870,3250) 3884.94,3235.06 3961.3,3235.06 3976.36,3220 v1(4095,3220) ; U10.16@3939.84,2990.64 3941.44,2992.23 3997.23,2992.23 4010,3005 v1(4075,3005)
  Bottom Layer w15: v1(4075,3005) 4085,3005 4095,3015 v1(4095,3220) 4095,3447.57 4100,3452.57 4100,3550 4232.5,3682.5 U12.1@4365,3682.5
OPWM6: R48.3 U10.17 U14.4 | length 837.1
  Top Layer w15: v1(3895,3015) 3896.23,3016.23 U10.17@3939.84,3016.23 3986.23,3016.23 4005,3035 4175,3035 v1(4185,3025) ; R48.3@3902.99,3315 3905,3312.99 v1(3905,3270)
  Bottom Layer w15: v1(3895,3015) 3905,3025 v1(3905,3270) ; v1(4185,3025) 4305,2905 U14.4@4365,2905
RS232R2: R82.1 U17.8 | length 173.8
  Top Layer w20: U17.8@575,1230 575,1175 655,1095 R82.1@655,1089.37
RS232T2: R83.1 U17.7 | length 151
  Top Layer w20: U17.7@525,1230 525,1160 550,1135 R83.1@550,1089.37
TEMP1: C72.2 R13.1 R41.2 | length 4920.6
  Top Layer w20: v2(2700,4635) 2700,4495 2680,4475 2680,4230 2725,4185 2914.63,4185 R13.1@2970.63,4241 ; v2(6330,4700) C72.2@6330,4604.37 R41.2@6420,4604.37
  Bottom Layer w20: v2@2710,4635 v2(2700,4635) 2700,4665 2725,4690 3445,4690 3685,4930 6295,4930 6330,4895 v2(6330,4700)
U: U6.3 U6.4 U.1 | length 2416.9
  Top Layer w100: U6.4@6805,4160 7004.51,4160 U.1@7084.51,4240 ; 7301.07,4241.07 7300,4240 U.1@7084.51,4240 ; 7336.44,4312.5 7080.47,4312.5 ; 7363.94,4340 7363.94,4385 ; U.1@7373.94,4442.82 U.1@7373.94,4245.96 U.1@7090.47,4245.96 U.1@7084.51,4240 ; 7080.47,4312.5 7080.47,4385 7363.94,4385 ; 7080.47,4312.5 7080.47,4240 U.1@7084.51,4240 ; 7363.94,4385 7363.94,4388.65 ; 7363.94,4388.65 7315.73,4436.85 7080.47,4436.85 7080.47,4450 7363.94,4450 7363.94,4388.65
U1: U4.4 U6.1 U6.2 | length 545.3
  Top Layer w100: U4.4@6225,3930 6285,3930 6515,4160 U6.1@6675,4160
UN: R25.1 R66.1 U12.6 | length 271.3
  Top Layer w20: U12.6@4665,3482.5 4722.5,3482.5 4755.63,3449.37 R66.1@4785,3449.37 4800.63,3449.37 4879.37,3370.63 R25.1@4890,3370.63
UP: R9.1 R57.1 U11.7 | length 243.4
  Top Layer w20: U11.7@4665,4050 4705,4050 4749.37,4005.63 R57.1@4785,4005.63 R9.1@4890,4005.63
V: U9.3 U9.4 V.1 | length 1816.4
  Top Layer w100: U9.4@6805,3730 V.1@7090.47,3730 ; V.1@7080,3715 V.1@7085.47,3715 ; V.1@7085.47,3716.98 V.1@7085.47,3715 ; 7090.47,3640 7085.47,3645 ; V.1@7363.94,3580 V.1@7085.47,3580 ; 7363.94,3645 7085.47,3645 ; V.1@7085.47,3580 7085.47,3645 ; V.1@7085.47,3580 7085.47,3520.13 7368.94,3520.13 7368.94,3716.98 7366.96,3715 V.1@7085.47,3715 ; 7085.47,3645 V.1@7085.47,3715
V1: U4.5 U9.1 U9.2 | length 458.5
  Top Layer w100: U4.5@6216.5,3727.5 U9.1@6675,3727.5
VCC_CAN: A1.6 C98.1 C101.2 C102.1 C103.2 C106.2 C113.2 C127.1 U15.10 U15.16 U16.3 U17.16 | length 1108.6
  Top Layer w20: v2(105,1125) C101.2@105,1175 ; C102.1@105,1365.63 120.63,1350 v2(175,1350) 210,1350 225,1365 U17.16@225,1418.98 ; C127.1@135,1545 175,1545 A1.6@285,1655 ; C106.2@1685,1014.37 1825.63,1014.37 1840,1000 U15.10@1840,951.3 ; v2@2034.7,710 U16.3@2034.7,795.15 ; U15.16@2140,951.3 2173.7,951.3 C98.1@2189.37,935.63 ; C103.2@2210,739.37 2230,759.37 v2(2230,795) ; C98.1@2215,935.63 2230,920.63 v2(2230,865)
  Bottom Layer w20: C113.2@135,1570.63 200.63,1570.63 A1.6@285,1655
  other v2: 2035,710 1750,1015
VDD: C1.2 C83.1 C97.2 C105.1 C125.1 C129.2 L10.1 R1.2 R50.5 R50.6 R50.7 R50.8 R51.5 R51.6 R51.7 R51.8 R52.2 U3.6 U13.16 U15.1 U15.7 U20.2@435,3420 | length 10502.7
  Top Layer w10: R51.8@3655,2795 R51.8@3662.5,2795 ; R50.5@3930,2795 R50.6@3907.99,2795 R50.5@3939.49,2795
  Top Layer w15: v1(3630,3360) 3715,3360 3739.37,3335.63 R52.2@3739.37,3285 ; v1(3635,2835) 3635,2815 R51.8@3655,2795
  Top Layer w20: U20.2@485,3420 U20.2@529.37,3420 ; v2(710,3775) 710,3560 685.63,3535.63 C129.2@645,3535.63 U20.2@529.37,3420 ; v2(770,1555) 735,1590 735,3315 630,3420 U20.2@529.37,3420 ; v2(1225,3775) 1255.63,3805.63 L10.1@1255.63,3920 ; v2(1685,1435) C105.1@1685,1364.37 1750.63,1430 1825,1430 1840,1415 U15.7@1840,1345 ; U15.1@2140,1345 2159.37,1364.37 C97.2@2245,1364.37 v2(2245,1425) ; v2@2859.37,1440 C83.1@2859.37,1370 2944.37,1285 U13.16@3014.49,1285 ; v2@3895,1459 3895,1760 4005,1870 4005,2635 ; R50.5@3939.49,2795 3950,2795 3985,2760 3985,2655 4040.63,2599.37 C1.2@4200,2599.37 ; v1(4255,2640) 4240.63,2640 C1.2@4200,2599.37 ; R1.2@4325,2530 4285,2530 4215.63,2599.37 C1.2@4200,2599.37 ; v1(4340,2640) 4355,2640 4360,2635 4406.8,2635 U3.6@4407.78,2635.98
  Top Layer w30: C125.1@230,3410 300,3410 310,3420 U20.2@435,3420
  Top Layer w40: R51.8@3662.5,2795 R51.6@3717.99,2795 R51.5@3749.49,2795 R50.8@3845,2795 R50.5@3930,2795
  Bottom Layer w15: v1(3630,3360) 3630,2840 v1(3635,2835)
  Bottom Layer w20: v2(710,3775) v2(1225,3775) ; v2(770,1555) 1255,1555 1375,1435 v2(1685,1435) 1710,1410 2230,1410 v2(2245,1425) 2475,1425 2520,1470 2830,1470 ; v2(2860,1440) 2830,1470 ; v2@3895,1459 3593.88,1459 3582.88,1470 2830,1470 ; v1(4255,2640) v1(4340,2640)
  other v1: 353,3386 384.67,3386 416.33,3386 448,3386 479.67,3386 511.33,3386 353,3423 384.67,3423 416.33,3423 448,3423 479.67,3423 511.33,3423 353,3459 384.67,3459 416.33,3459 448,3459 479.67,3459 511.33,3459
  other v2: 3895,1460
VN: R26.1 R70.1 U14.7 | length 234.8
  Top Layer w20: U14.7@4665,3105 4695,3075 4879.37,3075 R26.1@4885,3080.63
VP: R18.1 R58.1 U11.6 | length 285.7
  Top Layer w20: U11.6@4660,3950 4690,3950 4745.63,3894.37 R58.1@4785,3894.37 4863.74,3815.63 R18.1@4890,3815.63
W: U4.6 W.1 | length 2622.3
  Top Layer w100: U4.6@6216.5,3527.5 6687.5,3527.5 7090.47,3124.53 W.1@7090.47,3010.32 W.1@7373.94,3010.32 W.1@7373.94,2813.46 W.1@7090.47,2813.46 7090.47,2900 ; W.1@7344.02,2984.92 7090.47,2984.92 7090.47,2900 ; 7368.94,2900 7090.47,2900
WN: R29.1 R71.1 U14.6 | length 276.5
  Top Layer w20: U14.6@4665,3005 4705,3005 4750.63,2959.37 R71.1@4780,2959.37 4811.26,2959.37 R29.1@4890,2880.63
WP: R20.1 R65.1 U12.7 | length 229.9
  Top Layer w20: U12.7@4665,3582.5 4707.5,3582.5 4719.37,3570.63 R65.1@4785,3570.63 R20.1@4890,3570.63
Z: J16.3 R73.1 | length 1897.6
  Top Layer w20: R73.1@3029.37,1370 3070,1370 3085,1355 v2(3100,1355) ; v2(3750,1365) 3750,1260 3890,1120 J16.3@3890,275
  Bottom Layer w20: v2(3100,1355) 3301.97,1355 3324.47,1332.5 3362.5,1332.5 3395,1365 v2(3750,1365)
pads on no net: D11.2 J10.1 J10.4 J10.5 J10.6 J10.8 J10.9 J11.1 J11.4 J11.6 J11.7 J11.8 J11.9 J14.4 J14.5 J14.6 P1.11 P1.12 P1.13 P1.14 P1.15 P1.16 P1.19 P1.20 P1.23 P1.28 P1.32 P1.33 P1.34 P1.35 P1.36 P1.37 P1.38 P1.39 P1.40 P1.41 P1.42 P1.43 P1.44 P1.45 P1.46 P1.47 P1.48 P1.49 P1.50 P1.51 P1.52 P1.53 P1.54 P1.55 P1.56 P1.57 P1.58 P1.60 P1.61 P1.62 P1.63 P1.64 P1.65 P1.66 P1.67 P1.68 P1.69 P1.70 P1.71 P1.72 P1.73 P1.75 P1.77 P1.79 P1.80 P1.83 P1.84 P1.85 P1.86 P1.87 P1.88 P1.89 P1.90 P1.91 P1.92 P1.93 P1.94 P1.95 P1.96 P1.97 P1.98 P1.99 P1.100 P1.101 P1.102 P1.103 P1.104 P1.105 P1.106 P1.107 P1.108 P1.109 P1.110 P1.111 P1.112 P1.113 P1.114 P1.115 P1.116 P1.117 P1.118 P1.121 P1.123 P1.124 P1.125 P1.126 P1.127 P1.128 P1.129 P1.130 P1.131 P1.132 P1.133 P1.134 P1.135 P1.136 P1.137 P1.138 P1.139 P1.140 P1.141 P1.142 P1.143 P1.144 P1.145 P1.146 P1.147 P1.148 P1.149 P1.150 P1.151 P1.152 P1.153 P1.154 P1.155 P1.156 P1.165 P1.166 P1.167 P1.168 P1.169 P1.170 P1.171 P1.172 P1.173 P1.174 P1.175 P1.176 P1.177 P1.178 P1.179 P1.180 P1.181 P1.187 P1.194 P1.196 P1.198 P1.200 P1.202 P1.204 P1.205 P1.206 P1.207 P1.208 P1.209 P1.210 P1.211 P1.212 P1.213 P1.214 P1.215 P1.216 P1.261 P1.262 P1.263 P1.264 R48.4 R49.1 R50.4 R51.1 S1.3 U3.2 U10.2 U10.9 U10.11 U10.18 U13.4 U13.5 U13.6 U13.7 U16.5 U17.11 U17.12 U17.13 U17.14 U18.5 U19.5 U20.2@435,3703.94
copper on no net:
  other v3: 976.38,1626.65 3246.38,1631.65 930.42,1645.69 1022.34,1645.69 3200.42,1650.69 3292.34,1650.69 911.38,1691.65 1041.38,1691.65 3181.38,1696.65 3311.38,1696.65 930.42,1737.62 1022.34,1737.62 3200.42,1742.62 3292.34,1742.62 976.38,1756.65 3246.38,1761.65 976.38,3461.65 3246.38,3461.65 930.42,3480.69 1022.34,3480.69 3200.42,3480.69 3292.34,3480.69 911.38,3526.65 1041.38,3526.65 3181.38,3526.65 3311.38,3526.65 930.42,3572.62 1022.34,3572.62 3200.42,3572.62 3292.34,3572.62 976.38,3591.65 3246.38,3591.65
  other v4: 2775,4645

## Polygon pours and split planes (outlines as drawn)
GND_CAN on Bottom Layer "Top Layer-No Net" (solid, remove dead copper, pour order 38): 21.42,1590.62 21.42,1670.62 36.42,1685.62 564.67,1685.62 606.42,1643.87 606.42,1480.62 741.42,1345.62 1046.42,1345.62 1336.42,1055.62 2231.42,1055.62 2246.42,1040.62 2246.42,540.62 2386.42,400.62 2741.42,400.62 2771.42,370.62 2771.42,5.62 2761.42,-4.38 416.42,-4.38 376.42,35.62 376.42,300.62 313.39,363.64 68.39,363.64 26.42,405.62 21.42,410.62 21.42,1585.62
AGND on Bottom Layer "Top Layer-No Net" (solid, remove dead copper, pour order 42): 770,2445 770,3360 790,3380 1075,3380 1130,3435 3135,3435 3165,3405 3165,1810 3115,1760 1140,1760 1055,1845 775,1845 755,1865 755,2425 765,2435
VDD on Bottom Layer "Top Layer-No Net" (solid, remove dead copper, pour order 45): 200,3440 200,3475 205,3480 700,3480 705,3475 705,3195 675,3165 220,3165 200,3185 200,3440
VCC_CAN on VCC "Top Layer-No Net" (solid, remove dead copper, pour order 37): 25,1590 25,1670 40,1685 568.25,1685 610,1643.25 610,1480 745,1345 1050,1345 1340,1055 2235,1055 2250,1040 2250,540 2390,400 2745,400 2775,370 2775,5 2765,-5 420,-5 380,35 380,300 316.98,363.02 71.98,363.02 30,405 25,410 25,1585
AVDD on VCC "Top Layer-No Net" (solid, remove dead copper, pour order 31): 2255,2815 2630,2815 2635,2810 2635,1990 2615,1970 2235,1970 2200,2005 2200,2800 2210,2810 2250,2810
A+5V on VCC "Top Layer-No Net 1" (solid, remove dead copper, pour order 30): 1330,4195 1330,4410 1360,4440 1570,4440 1585,4455 1585,5055 1620,5090 3805,5090 3815,5080 3815,3740 3775,3700 1325,3700 1305,3720 1305,4005 1325,4025 1325,4190 1330,4195
DC_BUS on VCC "Top Layer-No Net 1" (solid, remove dead copper, pour order 32): 5810,1840 5810,2650 5860,2700 6690,2700 6810,2580 6810,2345 6955,2200 7115,2200 7150,2165 7150,1705 7105,1660 6885,1660 6720,1495 6720,680 6700,660 6360,660 6350,670 6350,1310 6180,1480 6165,1480 5815,1830
+5V1 on VCC "Top Layer-No Net 1" (solid, remove dead copper, pour order 44): 4395,1395 4230,1395 4215,1410 4215,2295 4240,2320 4595,2320 4610,2335 4610,4240 4670,4300 4900,4300 4910,4290 4910,4210 5010,4110 5010,1415 4985,1390 4395,1390 4390,1395
D+5V on VCC "Top Layer-No Net 1" (solid, remove dead copper, pour order 49): 3390,1720 3390,3495 3450,3555 3885,3555 4025,3695 4025,4185 4060,4220 4410,4220 4420,4210 4420,2500 4385,2465 4175,2465 4045,2335 4045,1435 4010,1400 3405,1400 3395,1410 3390,1415 3390,1705
VDD on VCC "Top Layer-No Net 1" (solid, remove dead copper, pour order 50): 1155,1490 1370,1275 1725,1275 2380,1275 2395,1260 2395,700 2490,605 2500,595 2835,595 2960,595 2975,580 2975,10 2995,-10 4275,-10 4290,5 4290,355 4245,400 4040,605 4040,1100 4040,1200 4005,1235 3365,1235 3300,1300 3195,1405 3170,1405 3085,1490 1160,1490
D+5V on VCC "Top Layer-No Net 1" (solid, remove dead copper, pour order 51): 85,1840 15,1910 15,2325 15,4610 40,4635 260,4635 355,4730 355,5060 390,5095 1475,5095 1485,5085 1485,4565 1460,4540 1270,4540 1240,4510 1215,4485 1215,4110 1215,3715 1200,3700 935,3700 825,3590 825,1855 810,1840 85,1840
+15V1 on VCC "Top Layer-No Net 1" (solid, remove dead copper, pour order 53): 4225,1310 4990,1310 5005,1295 5005,500 4980,475 4455,475 4215,715 4215,1305 4220,1310 4225,1305 4240,1305
GND_CAN on Top Layer "Top Layer-No Net" (solid, remove dead copper, pour order 36): 17.5,1590 17.5,1670 32.5,1685 560.75,1685 602.5,1643.25 602.5,1480 737.5,1345 1042.5,1345 1332.5,1055 2227.5,1055 2242.5,1040 2242.5,540 2382.5,400 2737.5,400 2767.5,370 2767.5,5 2757.5,-5 412.5,-5 372.5,35 372.5,300 309.48,363.02 64.48,363.02 22.5,405 17.5,410 17.5,1585
AGND on Top Layer "Top Layer-No Net" (solid, remove dead copper, pour order 40): 2195,3390 3135,3390 3150,3375 3150,1850 3110,1810 2235,1810 2205,1840 2205,3380 2200,3385
AGND on Top Layer "Top Layer-No Net" (solid, remove dead copper, pour order 41): 850,2730 850,3345 895,3390 1049.74,3390 1104.74,3445 3100,3445 3155,3390 3155,1790 3135,1770 1720,1770 1675,1815 1675,2045 1605,2115 915,2115 855,2175 850,2180 850,2730
VDD on Top Layer "Top Layer-No Net" (solid, remove dead copper, pour order 43): 200,3440 200,3475 205,3480 700,3480 705,3475 705,3195 675,3165 220,3165 200,3185 200,3440
GND on Top Layer "Top Layer-No Net" (solid, remove dead copper, pour order 47): 4325,2315 4525,2315 4535,2305 4535,2100 4250,2100 4240,2110 4240,2300 4250,2310 4255,2315 4325,2315
AGND on Top Layer "Top Layer-No Net" (solid, remove dead copper, pour order 48): 495,4585 815,4585 820,4580 820,4355 810,4345 505,4345 495,4355
DC_BUS on Top Layer "Top Layer-No Net 1" (solid, remove dead copper, pour order 52): 5255,765 5255,1835 5270,1850 6245,1850 6275,1820 6275,1065 6260,1050 5820,1050 5801.27,1031.27 5801.27,818.73 5775,792.46 5362.46,792.46 5310,740 5280,740 5255,765
NetC62_2 on Top Layer "Top Layer-No Net 1" (solid, remove dead copper, pour order 54): 4670,1250 4670,1340 4745,1415 5045,1415 5049.85,1410.15 5049.85,1215.15 5050,1215 5050,925 5035,910 4720,910 4680,950 4670,960 4670,1250
DC_BUS on Top Layer "Top Layer-No Net 1" (solid, remove dead copper, pour order 55): 6365,670 6365,895 6215,1045 6215,1185 6250,1220 6555,1220 6570,1205 6570,670 6555,655 6380,655 6360,675
GND on Top Layer "Top Layer-No Net 1" (solid, remove dead copper, pour order 58): 6560,3255 6565,3260 6665,3260 6675,3250 6675,3065 6745,3065 6810,3000 6810,2575 6810,1745 6915,1640 6960,1595 7060,1595 7145,1510 7145,1025 7135,1015 6895,1015 6850,1060 6850,1410 6795,1465 6595,1465 6560,1500 6560,3260
GND_CAN on GND "Top Layer-No Net" (solid, remove dead copper, pour order 34): 20,1590 20,1670 35,1685 563.25,1685 605,1643.25 605,1480 740,1345 1045,1345 1335,1055 2230,1055 2245,1040 2245,540 2385,400 2740,400 2770,370 2770,5 2760,-5 415,-5 375,35 375,300 311.98,363.02 66.98,363.02 25,405 20,410 20,1585
GND on GND "Top Layer-No Net 1" (solid, remove dead copper, pour order 33): 5975,630 5480,1125 5480,1425 5400,1425 5325,1500 5325,2240 5405,2320 5630,2320 5635,2315 5635,1815 5850,1600 7065,1600 7145,1520 7145,1127.99 7131.3,1114.29 6279.29,1114.29 6210,1045 6210,645 6165,600 6155,590 5985,590 5975,600 5975,635
GND on GND "Top Layer-No Net 1" (solid, remove dead copper, pour order 35): 4450,480 4215,715 4215,1145 4215,2265 4270,2320 4680,2320 4710,2350 5600,2350 5635,2315 5635,1450 5560,1375 5075,1375 5050,1350 5050,485 5040,475 4455,475 4450,480
GND on GND "Top Layer-No Net 1" (solid, remove dead copper, pour order 39): 4610,2315 4610,4240 4670,4300 4900,4300 4910,4290 4910,4210.13 5010,4110.13 5010,3960 5095,3875 5745,3875 5760,3860 5760,3366.09 5555,3161.09 5555,2395 5630,2320 5630,2095 5485,1950 4975,1950 4610,2315
AGND on GND "Top Layer-No Net 1" (solid, remove dead copper, pour order 46): 3585,4900 3740,5055 3830,5055 6865,5055 6905,5015 6905,4275 5835,4275 5820,4290 5820,4350 5880,4410 5935,4465 5935,4580 5935,4660 5870,4725 3620,4725 3585,4760 3585,4900
AGND on GND "Top Layer-No Net 1" (solid, remove dead copper, pour order 56): 15,1910 15,4615 40,4640 255,4640 354.69,4739.69 354.69,5054.69 379.51,5079.51 6840.49,5079.51 6905,5015 6705,4815 6705,4760 6672.24,4727.24 4860,4727.24 4815,4682.24 4815,4672.82 4815,4500 4780,4465 4445.21,4465 4425,4444.79 4425,2480 4405,2460 4175,2460 4048.31,2333.31 4048.31,601.69 4292.5,357.5 4292.5,7.5 4275,-10 2995,-10 2975,10 2975,500 2920,555 2910,565 2620,565 2420,565 2395,590 2395,1145 2310,1230 1385,1230 1140,1475 780,1475 735,1520 725,1530 725,1725 725,1785 675,1835 35,1835 15,1855 15,1910
GND on GND "Top Layer-No Net 1" (solid, remove dead copper, pour order 57): 5380,2275 5513.61,2141.39 5635,2141.39 5635,1875 5655,1855 6230,1855 6280,1805 6280,1455 6125,1300 5555,1300 5430,1425 5430,2225 5385,2270

## Keep-outs
Keep-Out Layer:
  lines w10: -10,63.73 -10,5011.27 cw(c83.73,5011.27) 83.73,5105 7351.27,5105 ; -8.73,63.73 ccw(c85,63.73) 85,-30 7351.27,-30 ; 7351.27,-31.27 ccw(c7351.27,62.46) 7445,62.46 7445,5010 ccw(c7351.27,5010) 7351.27,5103.73
  lines w30: 5105,3935 5200,3935 ; 5190,765 5255,700 5275,700 5305,700 5372.5,767.5 ; 6145,3825 6280,3825 ; 6150,3415 6280,3415 ; 6150,4230 6280,4230
  text "过孔开窗,阻焊颜色为绿色，字符为白色，铜箔厚度1OZ，其他默认" at 588,5421 h236.22

## Other copper
Top Layer:
  rectangle net GND: 5365,2675 5555,2880
  text "BIT_201804" at 4330,65 h300
VCC:
  rectangle net DC_BUS: 5810,2775 6165,2870
  rectangle net DC_BUS: 5810,2615 6265,2810

## Silkscreen, mask and mechanical layers (free items; w line width, h text height)
Top Overlay:
  text "12V" at 1130,4950 h100
  text "temp_motor" at 3200,4950 h100
  text "AGND" at 475,4945 h100
  text "Motor Controller_v2.0" at 3870,4900 h200
  text "Resistance (0-10V)" at 1630,4660 h100
  text "SPI" at 200,3295 h60
  text "2018.4" at 325,2875 h110
  text "CAN" at 2250,495 h160
  text "ABZ" at 3675,450 h160
  text "232" at 130,370 h160
  text "GPIO" at 2985,355 h160
Top Solder:
  rectangle: 5255,1140 5330,1465
  rectangle: 5345,1140 5420,1465
  rectangle: 5435,1140 5510,1465
  rectangle: 5345,805 5420,1130
  rectangle: 5435,805 5510,1130
  rectangle: 4950,1140 5025,1410

## Text inside footprints (layer, text, board x,y; h text height)
C18: Top Overlay "+" at 6321.3,1549.02 h60 r180
C19: Top Overlay "+" at 6860,130 h60 r180
C62: Top Overlay "+" at 5390,760 h60 r270
C74: Top Overlay "+" at 4740,865 h80 r180
C114: Top Overlay "+" at 4450,1395 h80 r270
C115: Top Overlay "+" at 335,4605 h80 r270
C119: Top Overlay "+" at 4425,1765 h80 r270
C121: Top Overlay "+" at 900,4440 h80
D3: Top Overlay "+" at 5040,4320 h80 r90
D4: Top Overlay "+" at 5683.31,4152.2 h80 r90
D8: Top Overlay "+" at 5678.31,3907.2 h80 r90
D20: Top Overlay "+" at 4955,440 h80 r90
D24: Top Overlay "+" at 5702.8,3863.31 h80 r180
J10: Top Overlay "6" at 2423.27,180.87 h80 r180; Top Overlay "9" at 2096.1,180.87 h80 r180; Top Overlay "5" at 2005,495 h80; Top Overlay "1" at 2450,500 h80
J11: Top Overlay "6" at 1178.27,180.87 h80 r180; Top Overlay "9" at 851.1,180.87 h80 r180; Top Overlay "5" at 765,495 h80; Top Overlay "1" at 1175,495 h80
P1: Top Overlay "PC1" at 3055,1865 h50; Top Overlay "PB1" at 1110,3605 h50; Top Overlay "PA1" at 1110,1785 h50
Z3: Top Overlay "+" at 4980,730 h80 r270
Z4: Top Overlay "+" at 4407.2,616.69 h80